# Altium PCB Line Sensor2.PcbDoc
Units mm, origin at the board's own origin, x right, y up, seen from the top; angles counter-clockwise.
Board outline 152.4 x 101.6 mm, 2 copper layers (Top Layer, Bottom Layer); 17 components, 10 nets, 46 pads, 0 vias.
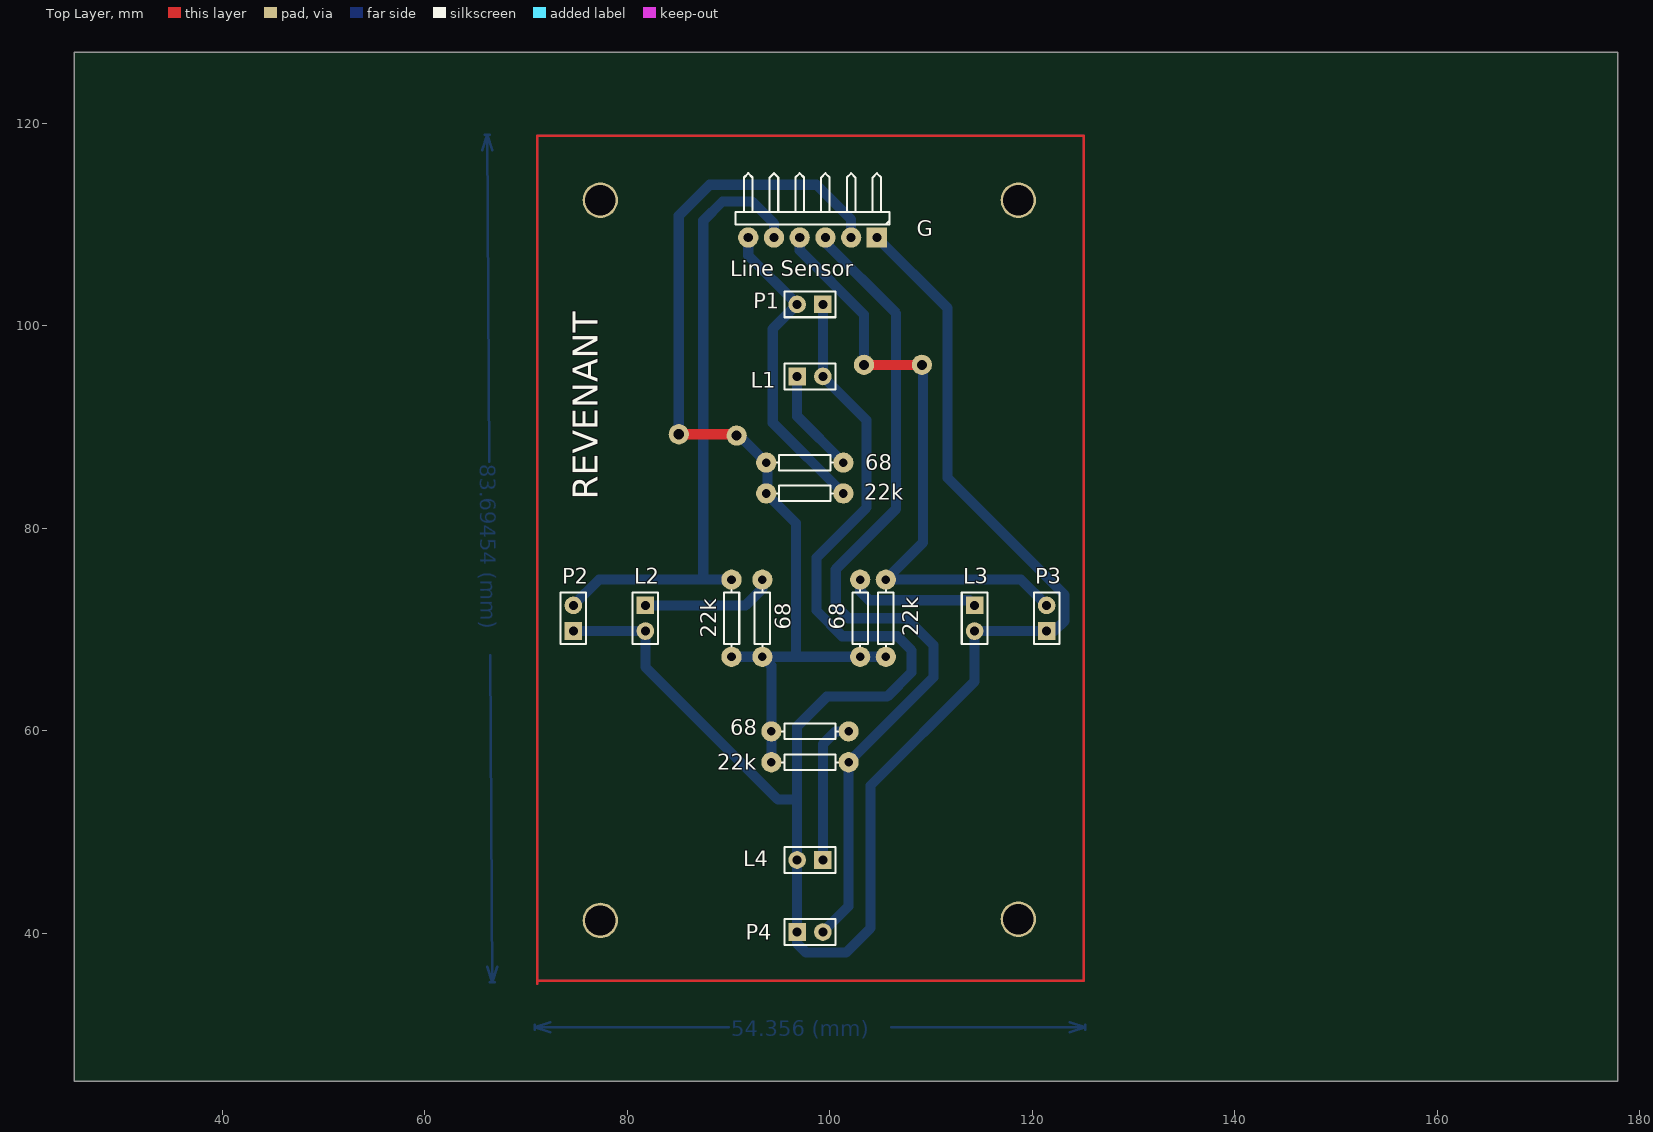
[diagram p0: Top Layer view]
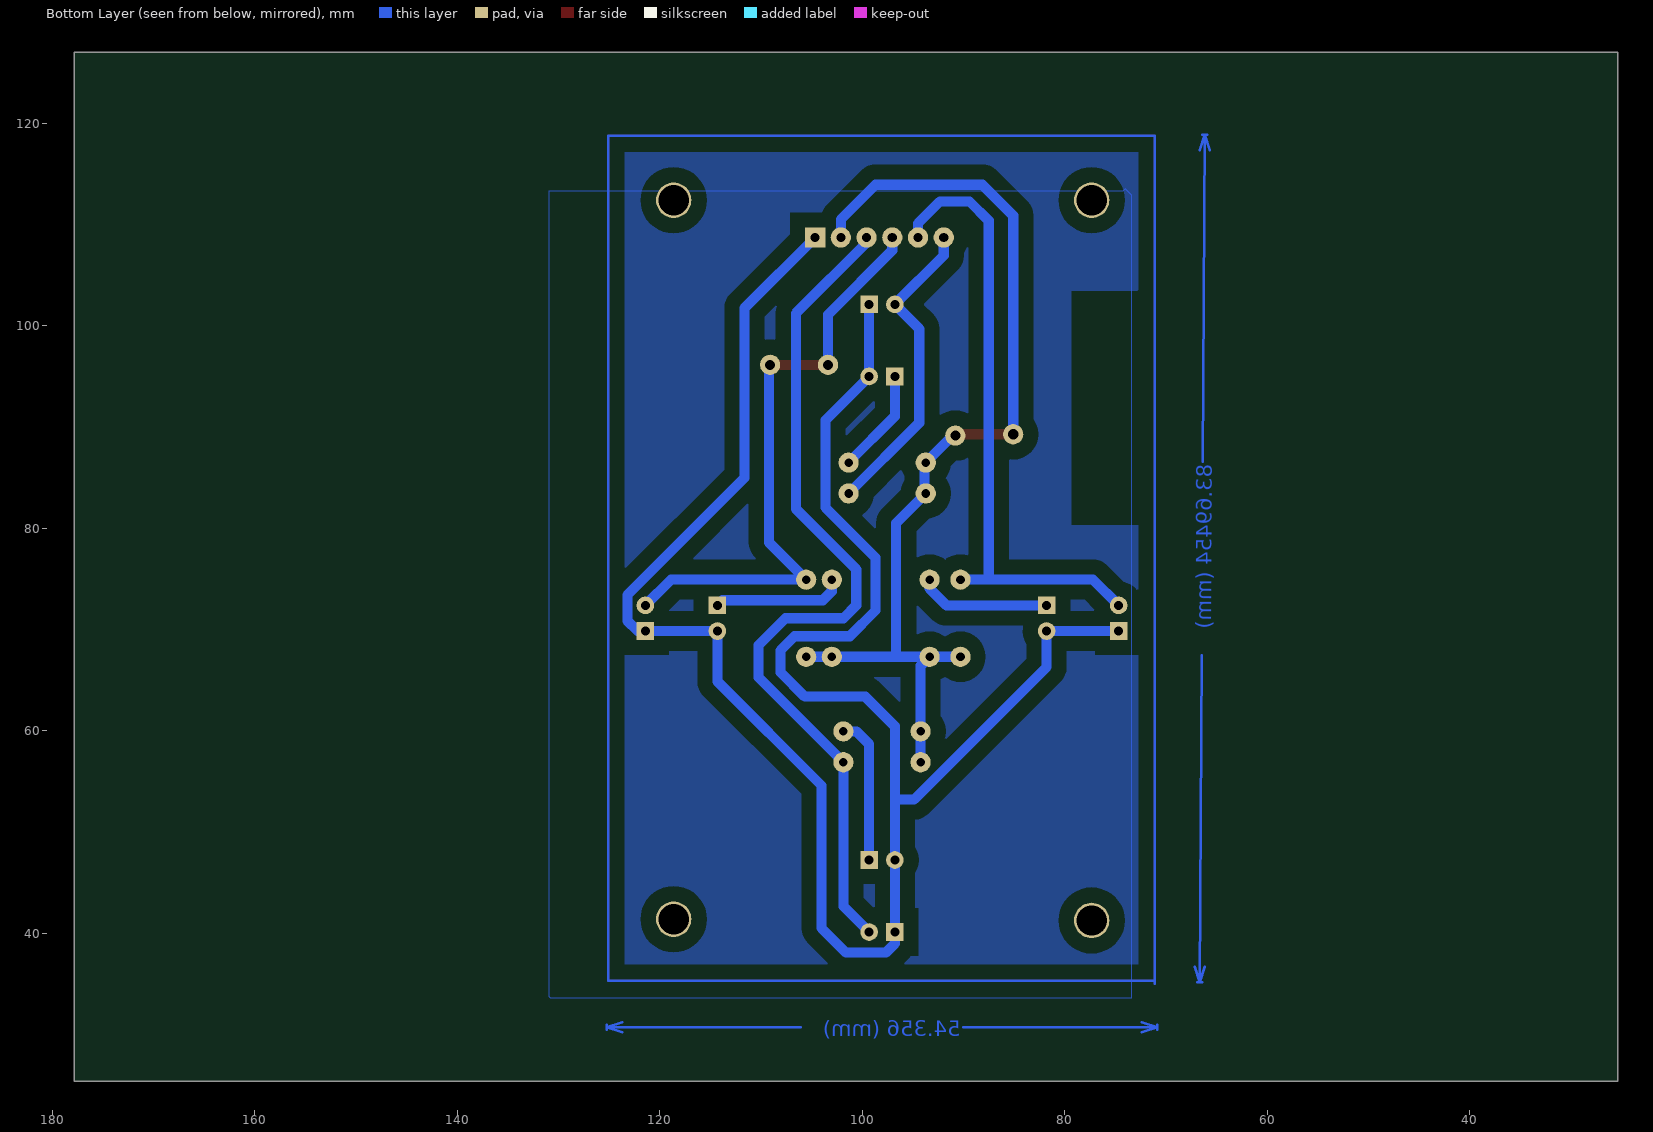
[diagram p1: Bottom Layer view, seen from below]

## Layer stack, top to bottom
Top Layer: signal copper 0.0356
Dielectric: dielectric 0.32, FR-4, Dk 4.8
Bottom Layer: signal copper 0.0356

## Board outline
25.4,25.4 177.8,25.4 177.8,127 25.4,127

## Design rules (kind name [scope] priority, off if disabled: settings)
Clearance Clearance_2 [InNamedPolygon('Bottom Layer-No Net')] p1: gap=1.5
Clearance Clearance_1 [All] p2: gap=0.254
Clearance [All] p3: gap=0.254
PolygonConnect PolygonConnect_1 [All vs IsNamedPolygon('Top Layer-No Net')] p1: connectstyle=NoConnect reliefconductorwidth=0.254 reliefentries=4 polygonreliefangle="90 Angle"
PolygonConnect [All] p2: connectstyle=Relief reliefconductorwidth=0.254 reliefentries=4 polygonreliefangle="90 Angle"
RoutingVias [All] p1: holewidth=0.711 width=1.27 viastyle="Through Hole" minholewidth=0.711 minwidth=1.27 maxholewidth=0.711 maxwidth=1.27
SilkscreenOverComponentPads [All] p1: minsilkscreentomaskgap=0.254
SolderMaskExpansion [All] p1: expansion=0.102
Width [All] p1: maxlimit=2 minlimit=1 preferedwidth=1 minimp=50.000000 maximp=50.000000 favimp=50.000000
27 further rules are at their usual default settings.

## Classes and differential pairs
polygon class PolygonClass_1: "Top Layer-No Net"

## Components (designator, comment, footprint, x,y, rotation, side; value= is the part's Value field where it differs from the comment)
22k "Res1" AXIAL-0.3 97.536,83.439 r0 top (schematic designator R2)
22k "Res1" AXIAL-0.3 90.297,71.12 r90 top (schematic designator R4)
22k "Res1" AXIAL-0.3 105.537,71.12 r90 top (schematic designator R6)
22k "Res1" AXIAL-0.3 98.044,56.896 r0 top (schematic designator R8)
68 "330" AXIAL-0.3 97.536,86.487 r0 top (schematic designator R1)
68 "Res1" AXIAL-0.3 102.997,71.12 r90 top (schematic designator R5)
68 "Res1" AXIAL-0.3 98.044,59.944 r0 top (schematic designator R7)
68 "Res1" AXIAL-0.3 93.345,71.12 r90 top (schematic designator R3)
L1 "LED1" BAT-2 98.044,94.996 r0 top (schematic designator D1)
L2 "LED1" BAT-2 81.788,71.12 r270 top (schematic designator D2)
L3 "LED1" BAT-2 114.3,71.12 r270 top (schematic designator D3)
L4 "LED1" BAT-2 98.044,47.244 r180 top (schematic designator D4)
"Line Sensor" "Header 6H" HDR1X6H 104.648,108.712 r180 top
P1 "Photo4" BAT-2 98.044,102.108 r180 top
P2 "Photo4" BAT-2 74.676,71.12 r90 top
P3 "Photo4" BAT-2 121.412,71.12 r90 top
P4 "Photo4" BAT-2 98.044,40.132 r0 top

## Footprints (in the part's own frame and the unit in brackets; to place one, negate y for a bottom-side part, rotate by r counter-clockwise, add the part's x,y. Pads: shape width x height; smd on the part's side, far side on the other; paste and mask are expansions set on the pad)
AXIAL-0.3 [mm] "Axial Device, Thru-Hole; 2 Leads; 0.3 in Pin Spacing"
  round 2 hole 0.85: 1(-3.81,0) 2(3.81,0)
  silkscreen extent -2.77,-0.76 2.77,0.76
BAT-2 [mm] "Multicell Battery; 2 Leads"
  rect 1.75x1.75 hole 0.9: 1(-1.27,0)
  round 1.75 hole 0.9: 2(1.27,0)
  silkscreen extent -2.54,-1.27 2.54,1.27
HDR1X6H [mm] "Connector; Header; 6 Position; Right Angle"
  rect 2x2 hole 0.9: 1(0,0)
  round 2 hole 0.9: 2(2.54,0) 3(5.08,0) 4(7.62,0) 5(10.16,0) 6(12.7,0)
  silkscreen extent -1.27,-6.35 13.97,-1.27

## Part data
22k 22k 22k 22k 68 68 68: "Resistor"
68: library part Res1, "Resistor"
L1 L2 L3 L4: "Typical RED GaAs LED"
"Line Sensor": "Header, 6-Pin, Right Angle"
P1 P2 P3 P4: library part LED1, "Typical RED GaAs LED"

## Free pads (board coordinates)
  round 3.5 hole 3: 0(77.343,112.395) 1(118.618,112.395) 2(77.343,41.275) 3(118.618,41.402)
  round 2 hole 1: 0(85.09,89.281) 0(103.378,96.139) 0(109.093,96.139) 1(90.805,89.154)

## Nets (pads, with @x,y where several pads share a name; then routed paths per layer and width w, separated by ;. In a path a pad name is that pad's centre, name@x,y a point inside that pad or via, vN(x,y) a via of type N, cw(c..) or ccw(c..) an arc to the next point about the centre after c; other vN are vias at no path point)
GND: "Line Sensor.1" L1.2 L2.2 L3.2 L4.2 P1.1 P2.1 P3.1 P4.1 | length 210.6
  Bottom Layer w1: P2.1 L2.2 81.788,66.294 94.869,53.213 96.774,53.213 ; P1.1@99.314,102.362 P1.1 L1.2 103.632,90.678 103.632,82.042 98.679,77.089 98.679,71.882 101.219,69.342 106.68,69.342 108.077,67.945 108.077,65.786 105.664,63.373 99.695,63.373 96.774,60.452 96.774,53.213 ; 104.648,108.712 111.633,101.727 111.633,84.963 123.19,73.406 123.19,70.866 122.174,69.85 L3.2 114.3,64.897 104.013,54.61 104.013,40.513 101.6,38.1 97.663,38.1 96.774,38.989 P4.1 L4.2 96.774,53.213
NetD1_1: 68.2@101.346,86.487 L1.1 | length 10.4
  Bottom Layer w1: L1.1 96.774,91.059 68.2@101.346,86.487
NetD2_1: 68.2@93.345,74.93 L2.1 | length 13.1
  Bottom Layer w1: L2.1 91.694,72.39 93.345,74.041 68.2@93.345,74.93
NetD3_1: 68.2@102.997,74.93 L3.1 | length 13
  Bottom Layer w1: 68.2@102.997,74.93 102.997,73.787 103.886,72.898 113.792,72.898 L3.1
NetD4_1: 68.2@101.854,59.944 L4.1 | length 14.5
  Bottom Layer w1: L4.1 99.314,58.674 100.584,59.944 68.2@101.854,59.944
"NetLine Sensor_3": 22k.2@101.854,56.896 "Line Sensor.3" P4.2 | length 85.8
  Bottom Layer w1: P4.2 101.854,42.672 101.854,56.896 110.236,65.278 110.236,68.453 107.569,71.12 101.854,71.12 100.584,72.39 100.584,75.946 106.553,81.915 106.553,101.219 99.568,108.204 99.568,108.712
"NetLine Sensor_4": 22k.2@105.537,74.93 "Line Sensor.4" P3.2 pad.0@103.378,96.139 pad.0@109.093,96.139 | length 60.7
  Top Layer w1: pad.0@103.378,96.139 pad.0@109.093,96.139
  Bottom Layer w1: 97.028,108.712 97.028,107.442 103.378,101.092 pad.0@103.378,96.012 ; pad.0@109.22,96.139 109.22,78.613 105.537,74.93 118.872,74.93 P3.2
"NetLine Sensor_5": 22k.2@90.297,74.93 "Line Sensor.5" P2.2 | length 62.2
  Bottom Layer w1: P2.2 77.216,74.93 87.503,74.93 ; 22k.2@90.297,74.93 87.503,74.93 ; 94.488,108.712 94.488,110.109 92.329,112.268 89.408,112.268 87.503,110.363 87.503,74.93
"NetLine Sensor_6": 22k.2@101.346,83.439 "Line Sensor.6" P1.2 | length 31.2
  Bottom Layer w1: 91.948,108.712 91.948,106.934 P1.2 94.361,99.695 94.361,90.424 22k.2@101.346,83.439
VCC: 22k.1 68.1 "Line Sensor.2" pad.0@85.09,89.281 pad.1@90.805,89.154 | length 102.3
  Top Layer w1: pad.0@85.09,89.281 90.678,89.281 pad.1@90.805,89.154
  Bottom Layer w1: pad.0@85.09,89.281 85.09,110.871 88.138,113.919 98.679,113.919 102.108,110.49 102.108,108.712 ; 22k.1@90.297,67.31 68.1@93.345,67.31 ; pad.1@90.805,89.154 91.059,89.154 68.1@93.726,86.487 ; 68.1@93.517,67.31 96.647,67.31 ; 68.1@93.853,86.487 93.853,83.312 96.647,80.518 96.647,67.31 ; 22k.1@94.234,56.896 94.234,59.944 94.234,66.421 68.1@93.345,67.31 ; 22k.1@105.537,67.31 102.997,67.31 96.647,67.31 ; 68.1@93.345,67.31 96.647,67.31
copper on no net: | length 117.8
  Bottom Layer w0.254: 65.668,117.345 66.167,118.872 ; 65.913,118.87 66.421,118.874 ; 66.158,36.7 66.675,35.179 ; 66.363,86.573 66.167,118.872 ; 66.421,35.177 66.929,35.181 ; 66.479,67.478 66.675,35.179 ; 66.684,117.351 66.167,118.872 ; 67.174,36.706 66.675,35.179 ; 70.866,30.48 70.866,30.988 ; 72.39,30.226 70.866,30.734 ; 72.39,31.242 70.866,30.734 ; 90.02,30.734 70.866,30.734 ; 106.068,30.734 125.222,30.734 ; 123.698,30.226 125.222,30.734 ; 123.698,31.242 125.222,30.734 ; 125.222,30.48 125.222,30.988

## Polygon pours and split planes (outlines as drawn)
no net on Bottom Layer "Top Layer-No Net" (solid, shelved, pour order 1001): 74.041,113.538 74.295,113.284 130.937,113.284 130.937,33.782 130.81,33.655 73.406,33.655 73.406,112.903 74.041,113.538
no net on Bottom Layer "Bottom Layer-No Net" (solid, pour order 1000): 71.12,118.745 125.095,118.745 125.095,35.306 71.12,35.306 71.12,118.745

## Other copper
Bottom Layer:
  text "83.69454 (mm)" at 65.45,86.313 h1.52 r270.35
  text "54.356 (mm)" at 90.274,29.82 h1.52
Multi-Layer:
  lines w0.254: 71.12,35.052 71.12,118.745 125.095,118.745 125.095,35.306 71.12,35.306

## Silkscreen, mask and mechanical layers (free items; w line width, h text height)
Top Overlay:
  text "G" at 108.585,108.839 h1.52
  text "REVENANT" at 77.089,82.804 h2.5 r90